# EAGLE board powerDistribution (EAGLE 9.5.2)
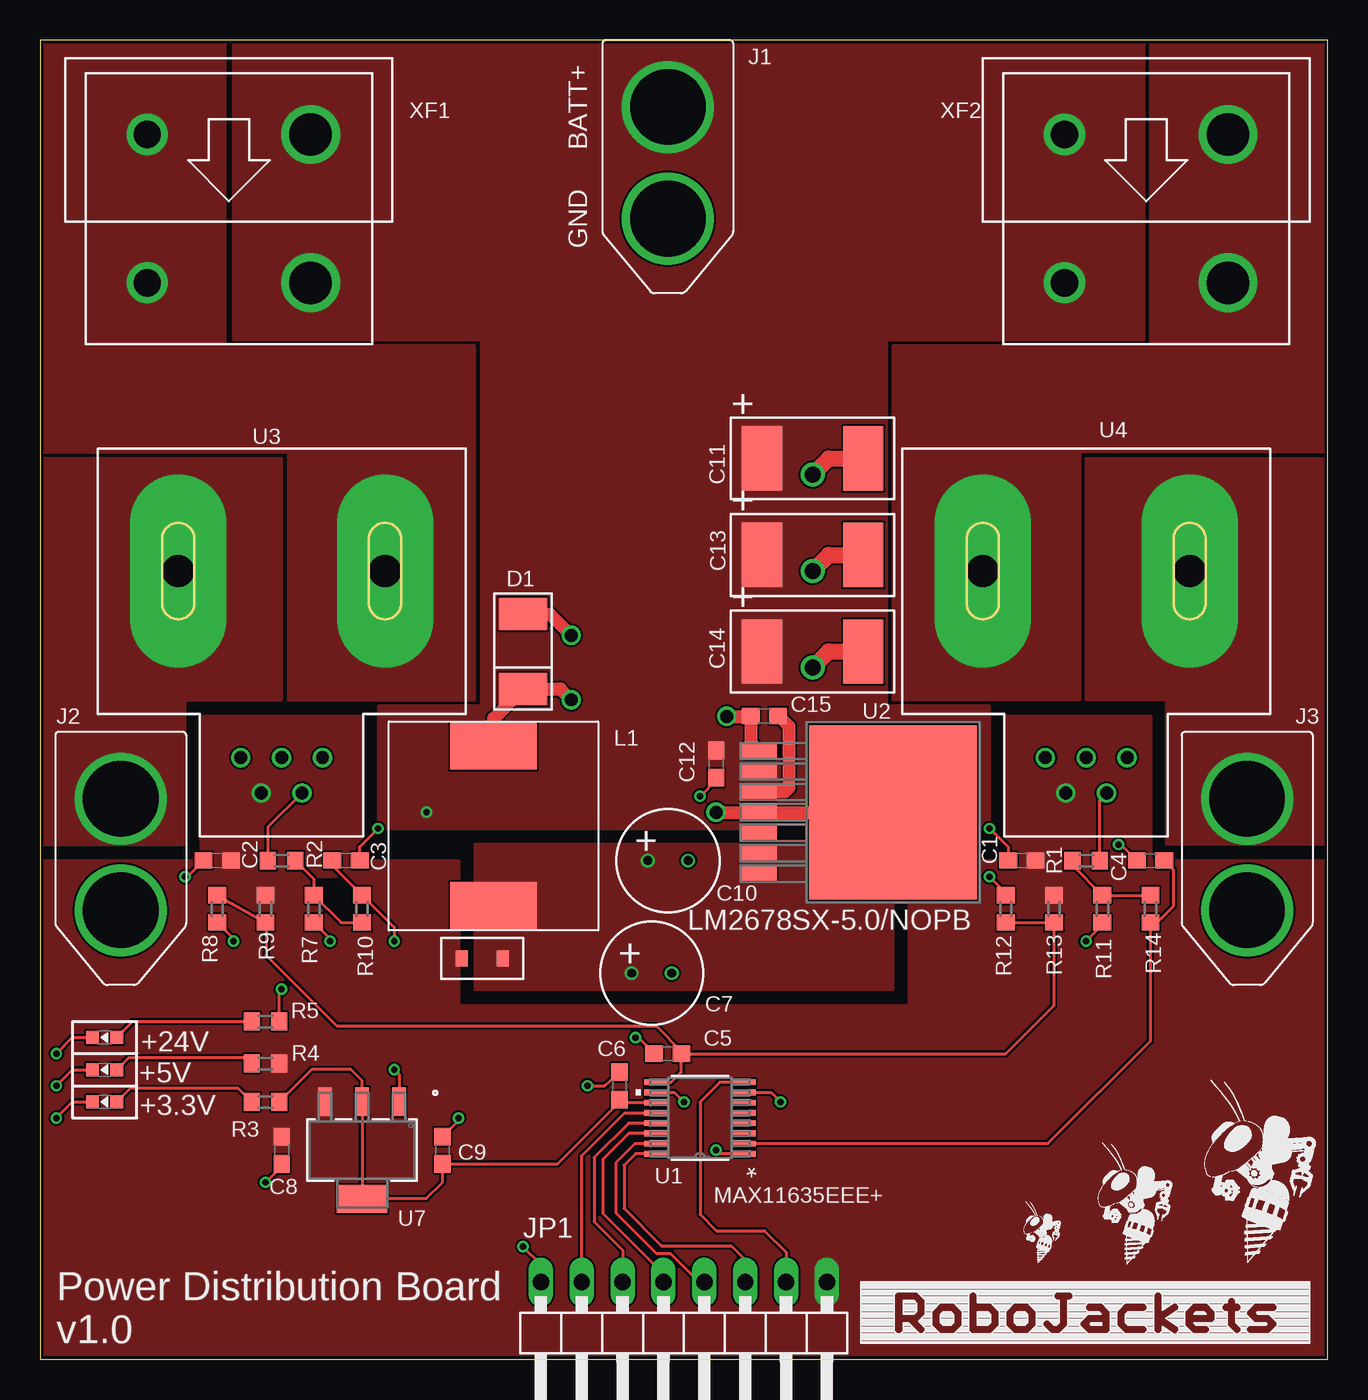
[diagram p0: board, top side]
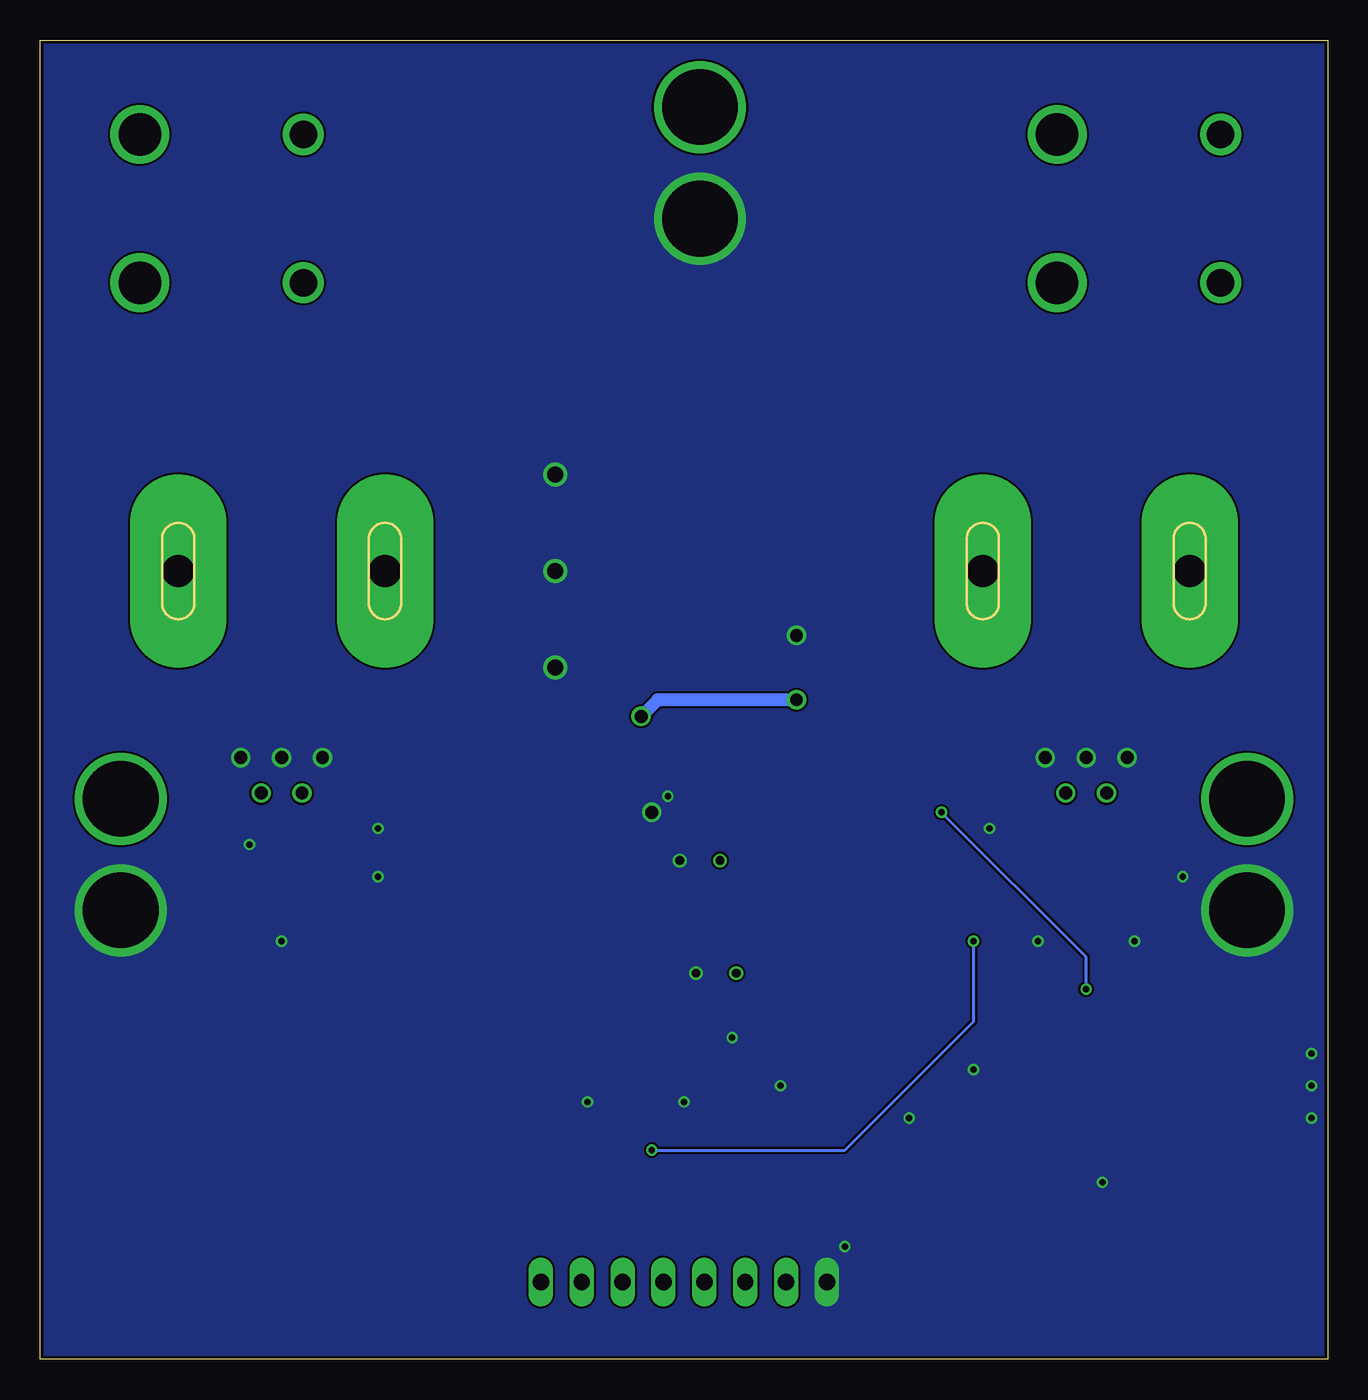
[diagram p1: board, bottom side, seen from below]

Size 80 x 82 mm. Coordinates in mm from the lower left corner, seen from the top.
Outline: 0,0 80,0 80,82 0,82 0,0
Copper layers (1+16): Top 0.035mm / dielectric 1.53mm / Bottom 0.035mm
Design rules "JLCPCB (2 Layer)": minimum track width 5mil, minimum drill 0.3mm, track to track 5mil, track to pad 5mil, pad to pad 5mil, via to via 20mil, smd to smd 5mil, copper to edge 0.2mm, drill to drill 21mil, minimum pad ring 6mil, minimum via ring 6mil, stop-mask expansion 6mil, vias tented up to drill 30mil, thermal gap 10mil

## Footprints (pad centres in the part's own frame; a part is rotated, then mirrored left to right if it is on the bottom)
CHIP-LED0603 = smd 0.8 x 0.8: A 0,-0.75; C 0,0.75
C0603 = smd 1.1 x 1: 1 -0.85,0; 2 0.85,0
860010373009 = drill 0.55 pad 0.8: 1 1.25,0; 2 -1.25,0
TR3E156M050C0300 = smd 2.5 x 4: 1 -3.15,0; 2 3.15,0
SD2114S040S8R0 = smd 2 x 3: 1 -2.325,0; 2 2.325,0
ERB-RE5R00V = smd 0.75 x 1: P$1 1.27,0; P$2 -1.27,0
XT-60 = drill 4.7: BATT 0,4.154; GND 0,11.092
1X08/90 = drill 1.016 long: 1 -8.89,-3.81; 2 -6.35,-3.81; 3 -3.81,-3.81; 4 -1.27,-3.81; 5 1.27,-3.81; 6 3.81,-3.81; 7 6.35,-3.81; 8 8.89,-3.81
INDUCTOR22 = smd 5.4 x 2.9: P$1 0,4.95; P$2 0,-4.95
R0603 = smd 1 x 1.1: 1 -0.85,0; 2 0.85,0
21-0055H_16_MXM = smd 1.46 x 0.356: 1 -2.724,2.223; 2 -2.724,1.587; 3 -2.724,0.953; 4 -2.724,0.318; 5 -2.724,-0.318; 6 -2.724,-0.953; 7 -2.724,-1.587; 8 -2.724,-2.223; 9 2.724,-2.223; 10 2.724,-1.587; 11 2.724,-0.953; 12 2.724,-0.318; 13 2.724,0.318; 14 2.724,0.953; 15 2.724,1.587; 16 2.724,2.223
TS7B = smd 0.91 x 2.16: 1 -3.81,-8.32; 2 -2.54,-8.32; 3 -1.27,-8.32; 4 0,-8.32; 5 1.27,-8.32; 6 2.54,-8.32; 7 3.81,-8.32 | smd 10.8 x 10.41: 8 0,0
CQ2065 = drill 0.8: 1 -2.54,-11.6; 2 -1.27,-13.8; 3 0,-11.6; 4 1.27,-13.8; 5 2.54,-11.6 | drill 2 pad 6 long: 6 6.425,0; 7 -6.425,0
SOT-223 = smd 0.851 x 1.761: 1 -2.3,-3.025; 2 0,-3.025; 3 2.3,-3.025 | smd 3.151 x 1.761: 4 0,3.025
3550 = drill 1.702: P$1 -6.35,4.14; P$3 -6.35,-5.08 | drill 2.642: P$2 3.81,4.14; P$4 3.81,-5.08

## Placement (x,y rotation side)
+3.3V  LED-SMD  [CHIP-LED0603]  4,16 90 top
+5V  LED-SMD  [CHIP-LED0603]  4,18 90 top
+24V  LED-SMD  [CHIP-LED0603]  4,20 90 top
C1  0.1uF  [C0603]  61,31 0 top
C2  0.1uF  [C0603]  11,31 0 top
C3  CF1  [C0603]  19,31 0 top
C4  CF1  [C0603]  69,31 180 top
C5  0.1uF  [C0603]  39,19 180 top
C6  0.1uF  [C0603]  36,17 90 top
C7  180uF  [860010373009]  38,24 180 top
C8  4.7uF  [C0603]  15,13 270 top
C9  4.7uF  [C0603]  25,13 90 top
C10  180uF  [860010373009]  39.01,31 180 top
C11  15uF  [TR3E156M050C0300]  48,56 0 top
C12  0.47uF  [C0603]  42,37 270 top
C13  15uF  [TR3E156M050C0300]  48,50 0 top
C14  15uF  [TR3E156M050C0300]  48,44 0 top
C15  100nF  [C0603]  45,40 180 top
D1  SD2114S040S8R0  [SD2114S040S8R0]  30,44 270 top
F1  ERB-RE5R00V  [ERB-RE5R00V]  27.47,24.92 0 top
J1  XT-60BATT_LABEL  [XT-60]  39,82 180 top
J2  CONNECTOR  [XT-60]  5,39 180 top
J3  CONNECTOR  [XT-60]  75,39 180 top
JP1  [1X08/90]  40,1 180 top
L1  22uH  [INDUCTOR22]  28.17,33.16 0 top
R1  20k  [R0603]  65,31 180 top
R2  20k  [R0603]  15,31 0 top
R3  100Ω  [R0603]  14,16 0 top
R4  200Ω  [R0603]  14,18.39 0 top
R5  1200Ω  [R0603]  14,21 0 top
R7  39k  [R0603]  17,28 90 top
R8  39k  [R0603]  11,28 270 top
R9  20k  [R0603]  14,28 90 top
R10  RF1  [R0603]  20,28 270 top
R11  39k  [R0603]  66,28 90 top
R12  39k  [R0603]  60,28 90 top
R13  20k  [R0603]  63,28 90 top
R14  RF1  [R0603]  69,28 90 top
U1  MAX11635EEE+  [21-0055H_16_MXM]  41,15 180 top
U2  LM2678SX-5.0/NOPB  [TS7B]  53,34 270 top
U3  CQ2065  [CQ2065]  15,49 0 top
U4  CQ2065  [CQ2065]  65,49 0 top
U7  AP2114H-3.3TRG1  [SOT-223]  20,13 180 top
U$1  [ROBOJACKETS]  51,1 0 top
U$2  [ROBOBUZZ_0.2X]  62,6 0 top
U$4  [ROBOBUZZ_0.4X]  67.5,5.9 0 top
U$5  [ROBOBUZZ_0.6X]  75,6 0 top
XF1  3550(2)  [3550]  13,72 0 top
XF2  3550(2)  [3550]  70,72 0 top

## Library data of the parts
+3.3V +5V +24V = RoboJackets-LEDs
C1-C6 C8 C9 C12 C15 = rcl; SPICEPREFIX: C
C7 C10 C11 C13 C14 D1 F1 J2 J3 L1 U2-U4 XF1 XF2 = CurrentSensing
J1 = RoboJackets-Connectors
JP1 = pinhead
R1-R5 R7-R14 = rcl; SPICEPREFIX: R
U1 = CurrentSensing; BUILT_BY: EMA_UL_Team; MANUFACTURER_PART_NUMBER: MAX11635EEE+; SOURCELIBRARY: Maxim_2014-05-21; VENDOR: Maxim Integrated Products
U7 = Gucci_ControlBoard; MANUFACTURER_PART_NUMBER: AP2114H3.3TRG1; VENDOR: Diodes Inc
U$1 U$2 U$4 U$5 = RoboJackets-Aesthetics

## Nets
!CNVST!: JP1.2 U1.8
!CS!: JP1.7 U1.12
!EOC!: JP1.3 U1.16
+3V3: C6.1 C9.1 R3.2 U1.11 U7.2 U7.4
+5V: C1.2 C2.2 C8.1 F1.P$2 JP1.1 R4.2 R9.2 R13.2 U3.2 U4.2 U7.3
+24V: C11.1 C12.1 C13.1 C14.1 J1.BATT R5.2 U2.2 XF1.P$2 XF1.P$4 XF2.P$1 XF2.P$3
AIN0: C3.1 R10.1 U1.1
AIN1: C4.1 R14.1 U1.2
GND: +3.3V.C +5V.C +24V.C C1.1 C2.1 C3.2 C4.2 C5.2 C6.2 C7.2 C8.2 C9.2 C10.2 C11.2 C12.2 C13.2 C14.2 D1.1 J1.GND J2.GND J3.GND JP1.8 R7.1 R8.2 R11.1 R12.2 U1.7 U1.10 U2.4 U2.8 U3.1 U3.3 U3.5 U4.1 U4.3 U4.5 U7.1
MISO: JP1.4 U1.15
MOSI: JP1.5 U1.14
N1: J2.BATT U3.7
N2: J3.BATT U4.6
N$1: R1.1 U4.4
N$2: R2.2 R7.2 R10.2
N$3: R2.1 U3.4
N$4: R1.2 R11.2 R14.2
N$5: +3.3V.A R3.1
N$6: C15.2 D1.2 L1.P$1 U2.1
N$7: C15.1 U2.3
N$8: +5V.A R4.1
N$9: +24V.A R5.1
N$10: C7.1 C10.1 F1.P$1 L1.P$2 U2.6
P1: U3.6 XF1.P$1 XF1.P$3
P2: U4.7 XF2.P$2 XF2.P$4
SCLK: JP1.6 U1.13
VREF: C5.1 R8.1 R9.1 R12.1 R13.1 U1.9

## Tracks (layer width: path | path; a pad name or v marks a point on that pad's centre or on a via)
!CNVST!
  Top 0.2: U1.8 42.22,17.22 41,16 41,9 42,8 45,8 46.35,6.65 JP1.2
!CS!
  Top 0.2: JP1.7 33.65,12.65 36.32,15.32 U1.12
!EOC!
  Top 0.2: U1.16 37,12.78 36.29,12.07 36.29,9.37 38.6,7.06 42.94,7.06 43.81,6.19 JP1.3
+3V3
  Top 0.2: U7.4 20.01,9.99 | 20.01,9.99 20.02,10 24,10 25,11 C9.1 32.15,12.15 36.08,16.07 | U1.11 36.2,15.95 36.08,16.07 | 36.08,16.07 C6.1 | 20.01,9.99 20.01,16.01 U7.2 20,17.31 19.3,18.01 16.86,18.01 R3.2
+5V
  pour Top (no thermals): 0,31 26,31 26,22 54,22 54,31 80,31 80,0 0,0
  pour Top (no thermals): 10,30 10,40 20,40 20,30
  pour Top (no thermals): 60,40 69,40 69,30 60,30
+24V  (via drill 0.4)
  Top 0.2: R5.2 14.85,22.85 v15,23
  Bottom 0.2: v15,23 15,25 v24,34
  pour Top (no thermals): 12,82 12,63.4 27.4,63.4 27.4,40.6 21,40.6 21,33 59,33 59,40.6 52.6,40.6 52.6,63.4 68.6,63.4 68.6,82
AIN0  (via drill 0.4)
  Top 0.2: U1.1 42.22,12.78 v42,13 | C3.1 18.15,30.7 R10.1 22,26.85 v22,26
  Bottom 0.2: v42,13 30,13 22,21 v22,26
AIN1
  Top 0.2: C4.1 70.4,30.45 70.4,28.14 69.41,27.15 R14.1 68.97,27.15 68.97,19.75 62.62,13.41 U1.2
GND  (via drill 0.4, 0.8, 1)
  Top 0.2: C6.2 35.08,17 v34,17 | C9.2 26,14.85 v26,15 | C8.2 15,12 v14,11 | v22,18 22.3,17.7 U7.1 | C12.2 42,36 v41,35 | v37,20 37.15,20 C5.2 | U1.7 45.41,16.59 v46,16 | R8.2 12,26.15 v12,26 | C2.1 9.15,30 v9,30 | U1.10 39.41,16.59 v40,16 | R7.1 18,26.15 v18,26 | v59,30 60,29 R12.2 | v65,26 66,27 R11.1 | v67,32 67.15,32 C4.2 | v1,15 2,16 +3.3V.C | v1,17 2,18 +5V.C | v1,19 2,20 +24V.C | v30,7 31.11,5.89 JP1.8 | v59,33 60.15,31.85 C1.1 | C3.2 19.85,31.85 v21,33
  Top 0.813: v42,34 U2.4 U2.8 | D1.1 31.68,46.33 v33,45
  Top 1: v48,55 49,56 C11.2 | v48,49 49,50 C13.2 | v48,43 49,44 C14.2
  pour Bottom (no thermals): 0,0 80,0 80,82 0,82
MISO
  Top 0.2: U1.15 38.25,13.39 36.95,13.39 35.77,12.21 35.77,9.11 38.29,6.59 39.15,6.59 40.93,4.81 JP1.4
MOSI
  Top 0.2: U1.14 36.58,14.05 34.97,12.44 34.97,9.07 38.73,5.31 JP1.5
N1
  pour Top (no thermals): 0,32 9,32 9,41 15,41 15,56 0,56
N2
  pour Top (no thermals): 65,56 80,56 80,32 70,32 70,41 65,41
N$1
  Top 0.2: R1.1 65.85,34.78 U4.4
N$2
  Top 0.2: R2.2 17,29.85 R7.2 18.7,27.15 R10.2
N$3
  Top 0.2: U3.4 14.15,33.08 R2.1
N$4
  Top 0.2: R14.2 R11.2 64.15,30.7 R1.2
N$5
  Top 0.2: R3.1 12.32,16.83 5.58,16.83 +3.3V.A
N$6  (via drill 0.8)
  Top 0.813: L1.P$1 28.17,39.84 D1.2 32.33,41.67 v33,41 | U2.1 44.15,38.34 C15.2 44.12,39.97 v42.66,39.97
  Bottom 0.813: v33,41 41.63,41 v42.66,39.97
N$7
  Top 0.813: C15.1 45.88,40 46.52,39.36 46.52,35.52 46.27,35.27 U2.3
N$8
  Top 0.2: +5V.A 5.5,18.75 12.79,18.75 R4.1
N$9
  Top 0.2: +24V.A 5.75,21 R5.1
N$10
  pour Top (no thermals): 27,32 27,23 53,23 53,32
P1
  pour Top (no thermals): 15.4,41 27,41 27,63 11.5,63 11.5,82 0,82 0,56.4 15.4,56.4
P2
  pour Top (no thermals): 80,82 80,56.4 64.6,56.4 64.6,41 53,41 53,63 69,63 69,82
SCLK
  Top 0.2: U1.13 36.56,14.68 34.42,12.54 34.42,8.55 36.19,6.78 JP1.6
VREF
  Top 0.2: R8.1 R9.1 14.03,27.12 14.03,25.12 18.42,20.73 38.27,20.73 39.85,19.15 C5.1 | C5.1 60,19 62.98,21.98 62.98,27.13 R13.1 R12.1 | U1.9 39.21,17.22 39.85,17.86 C5.1

## Text on the board
tPlace: Power Distribution Board / v1.0
tSilk: RoboWrestling 2020 / v1.0